# Altium PCB Gate_Driver_Boost_Conv_V1.0_PCB.PcbDoc
Units mm, origin at the board's own origin, x right, y up, seen from the top; angles counter-clockwise.
Board outline 38.61 x 29.34 mm, 2 copper layers (Top Layer, Bottom Layer); 36 components, 28 nets, 106 pads, 91 vias.
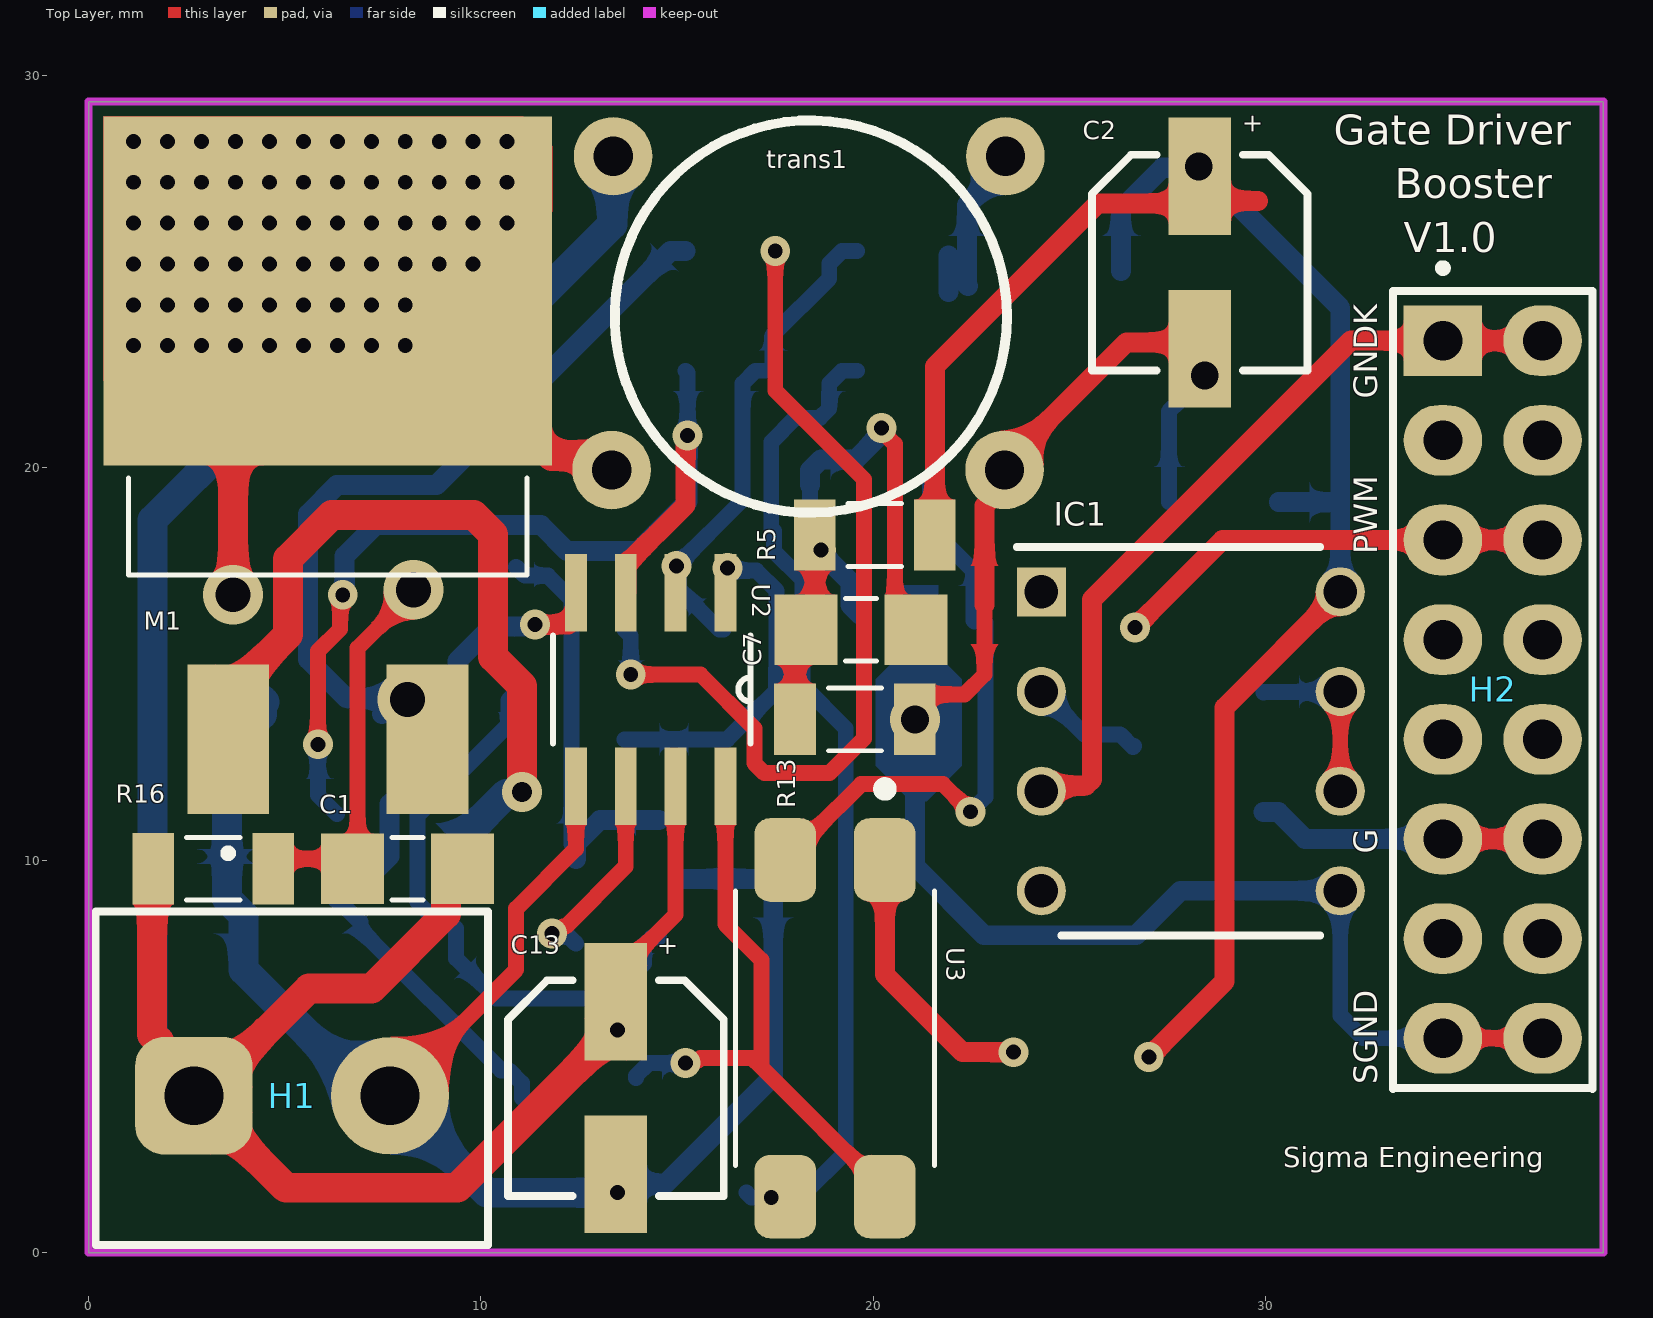
[diagram p0: Top Layer view]
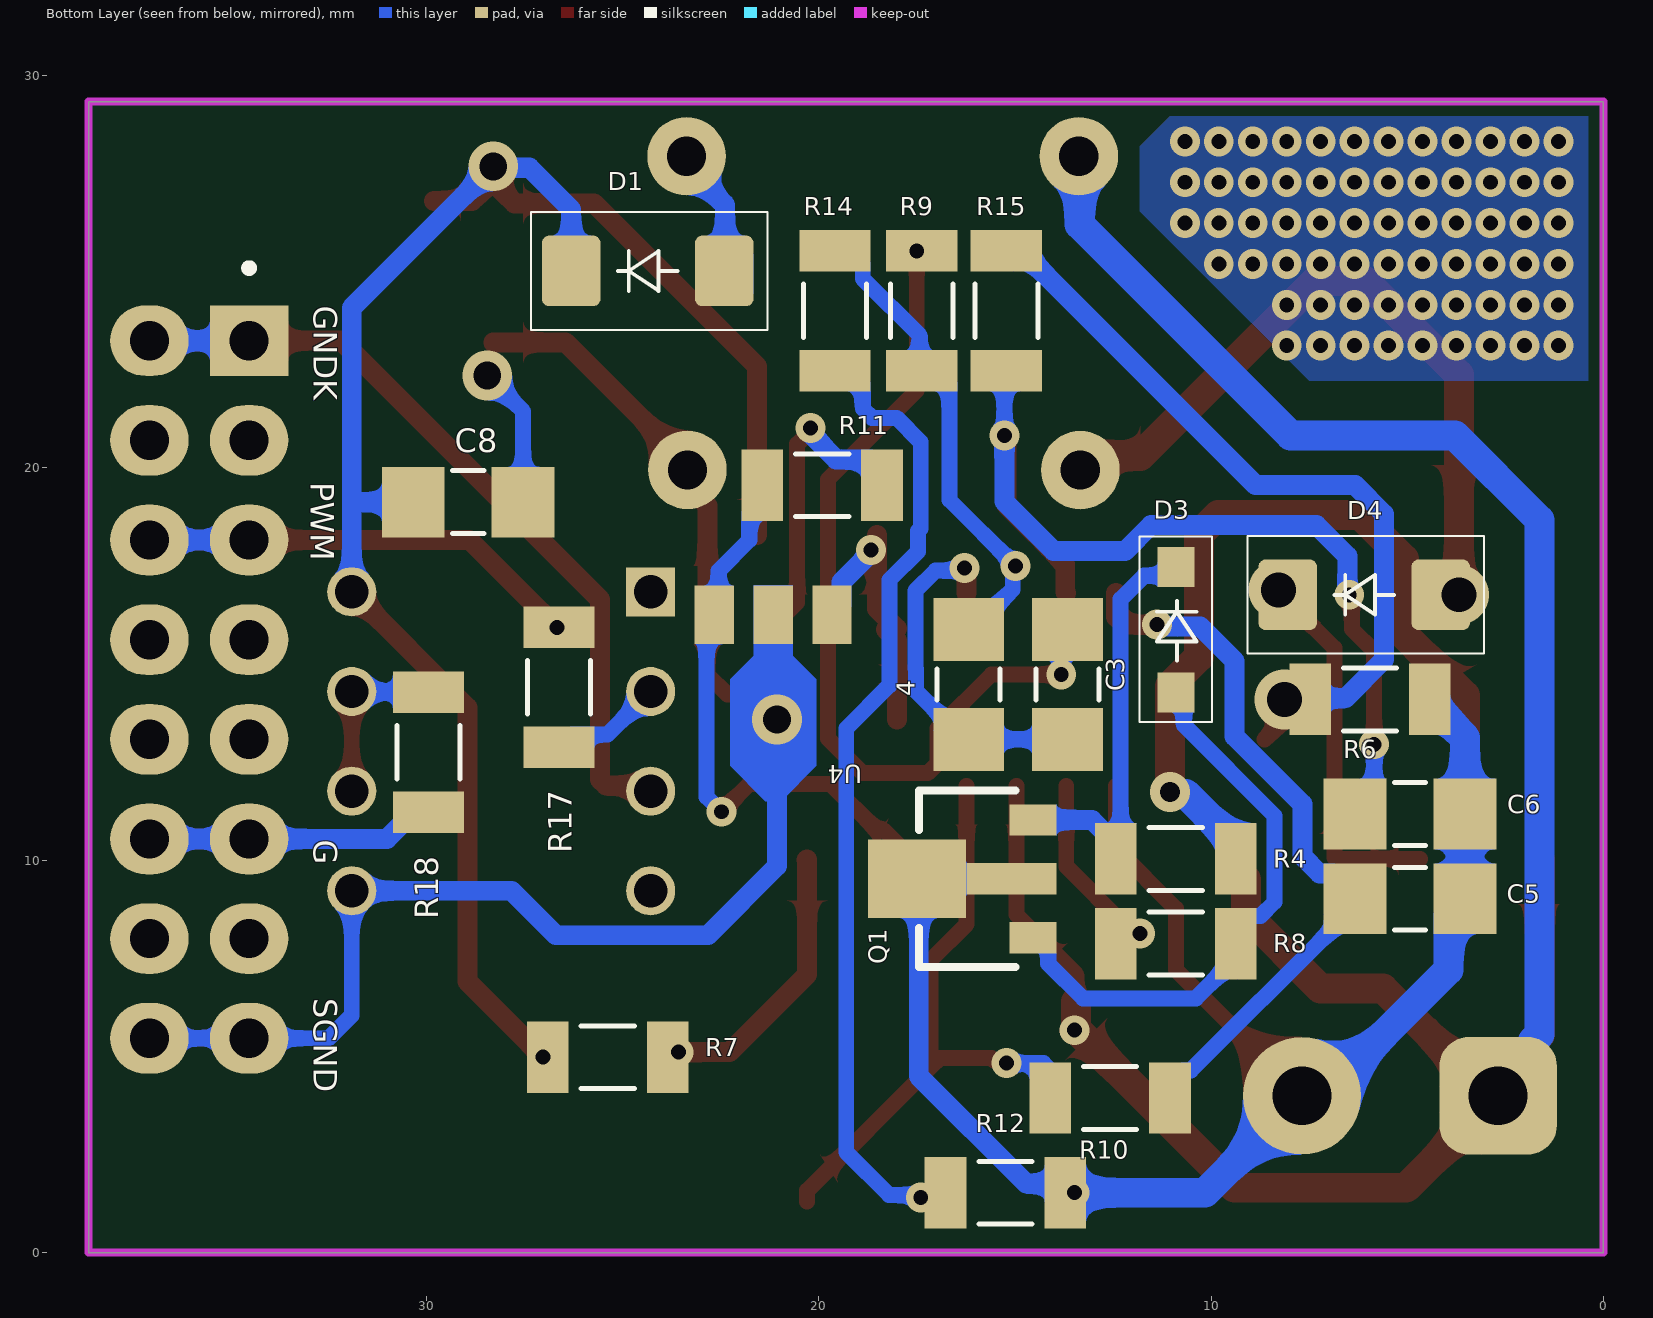
[diagram p1: Bottom Layer view, seen from below]
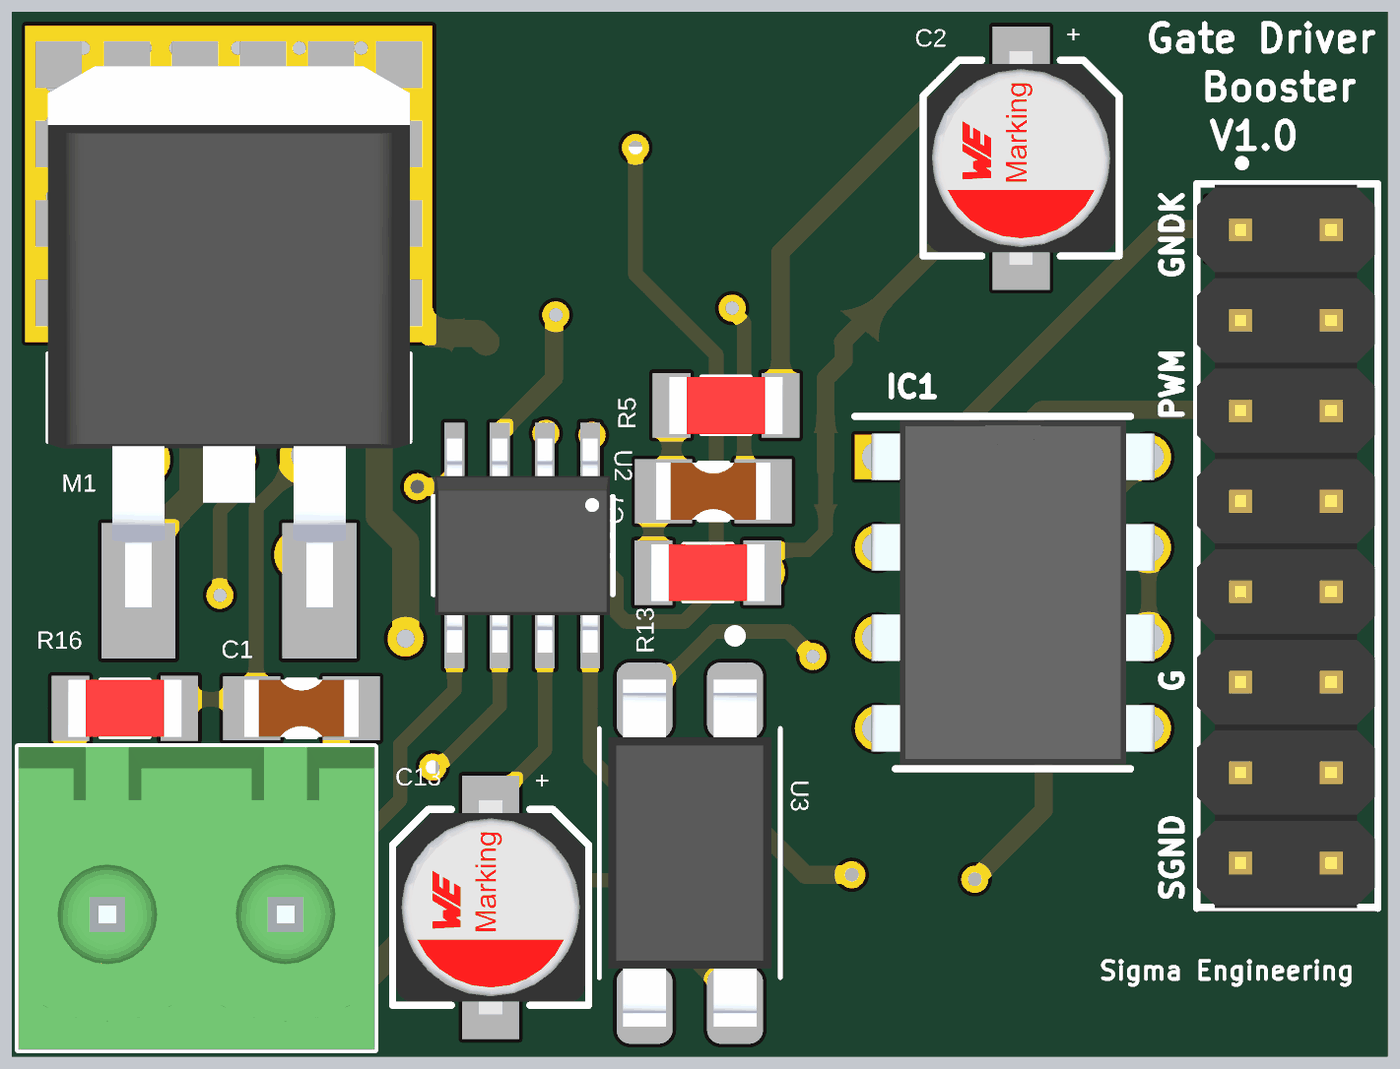
[diagram p2: 3D render of the assembled board from above, using the file's embedded part models]
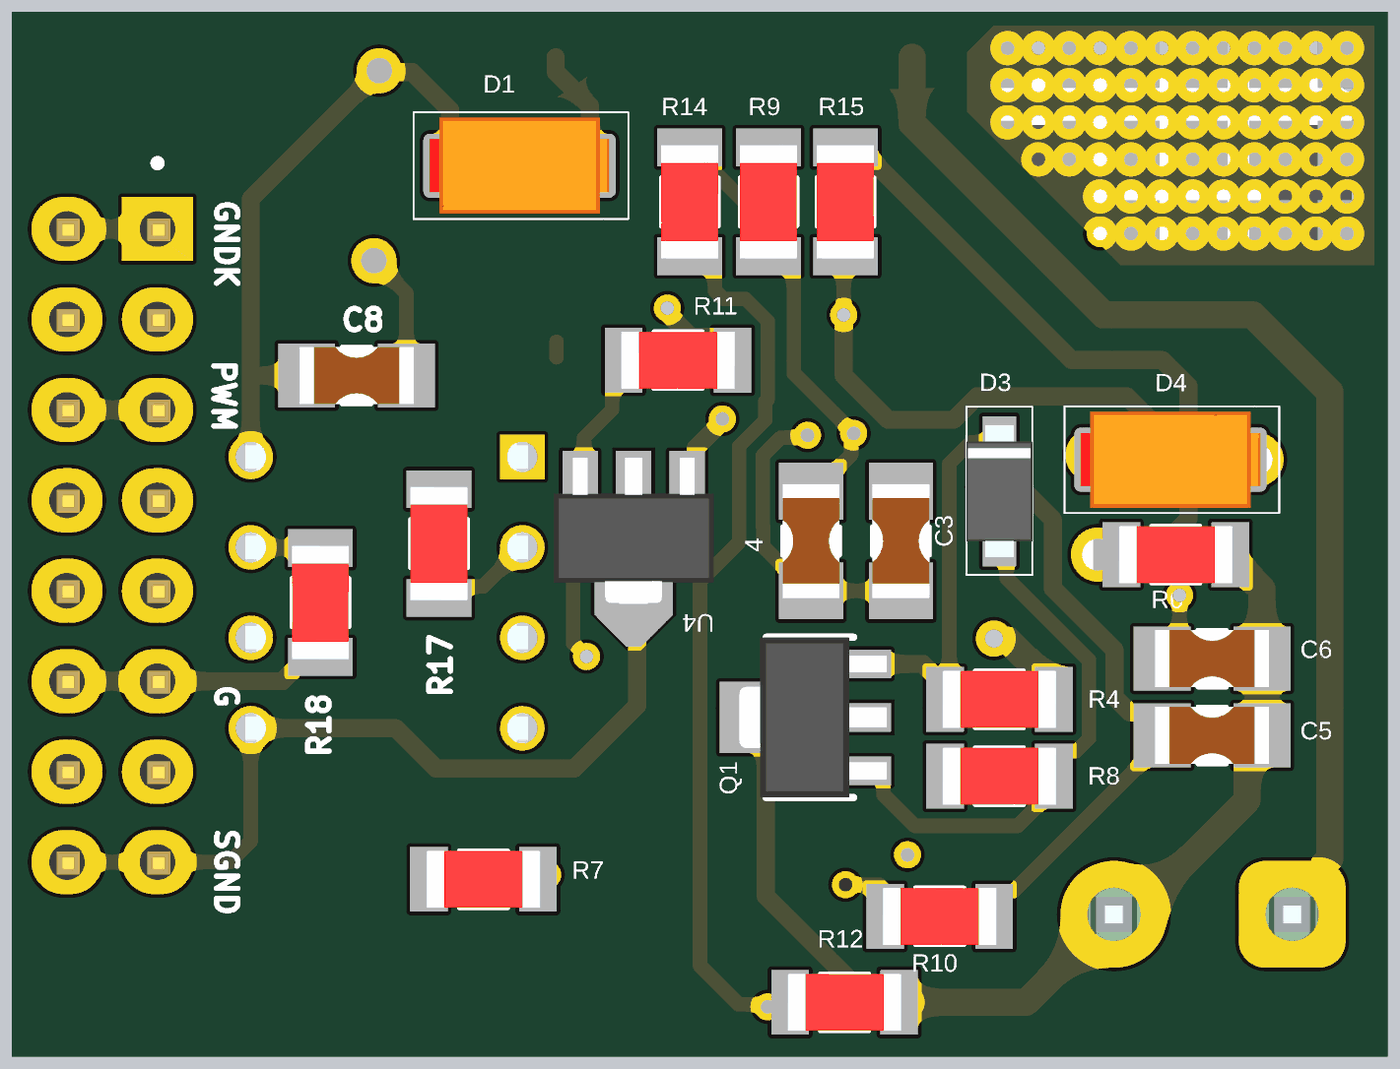
[diagram p3: 3D render of the assembled board from below, using the file's embedded part models]

## Layer stack, top to bottom
Top Solder: solder mask 0.0102, Solder Resist, Dk 3.5
Top Layer: signal copper 0.0356
Dielectric 1: dielectric 0.32, FR-4, Dk 4.8
Bottom Layer: signal copper 0.0356
Bottom Solder: solder mask 0.0102, Solder Resist, Dk 3.5

## Board outline
0,0 38.608,0 38.608,29.337 0,29.337

## Design rules (kind name [scope] priority, off if disabled: settings)
Clearance [All] p1: gap=0.254 ignorepadtopadclearanceinfootprint=FALSE except(0: Arc-Hole Track-Hole SMDPad-Hole THPad-Hole Via-Hole Fill-Hole Poly-Hole Region-Hole Text-Hole)
MinimumSolderMaskSliver [All] p1: minsoldermaskwidth=0.127
PolygonConnect [All] p1: connectstyle=Relief reliefconductorwidth=0.254 reliefentries=4 polygonreliefangle="90 Angle" airgapwidth=0.254
RoutingVias [All] p1: holewidth=0.381 width=0.762 viastyle="Through Hole" minholewidth=0.381 minwidth=0.762 maxholewidth=1.016 maxwidth=2
SilkToSilkClearance [All] p1: silktosilkclearance=0
SilkToSolderMaskClearance [IsPad] p1: minsilkscreentomaskgap=0 clearancetoexposedcopper=TRUE
SolderMaskExpansion [All] p1: expansion=0.102 istentingtop=FALSE
Width [All] p1: maxlimit=0.762 minlimit=0.406 preferedwidth=0.508
27 further rules are at their usual default settings.

## Components (designator, comment, footprint, x,y, rotation, side; value= is the part's Value field where it differs from the comment)
4 "10nAC" CAP_1206 16.18,14.478 r270 bottom
C1 "3.3n" CAP_1206 8.128,9.779 r0 top
C2 "470u-50v" WCAP-ASLI_D5H5.5 28.321,25.232 r90 top
C3 "10nAC" CAP_1206 13.659,14.478 r270 bottom
C5 "13.6n" CAP_1206 4.928,9.017 r0 bottom
C6 "100pf" CAP_1206 4.928,11.176 r0 bottom
C7 "10n" CAP_1206 19.685,15.875 r180 top
C8 "0.1u" CAP_1206 28.934,19.126 r180 bottom
C13 "470u-50v" WCAP-ASLI_D5H5.5 13.437,4.191 r90 top
D1 "Diode" US1K_SMD 24.359,25.019 r180 bottom value="Diode US1K"
D3 "1N5817" 1N5817W 10.897,15.875 r270 bottom
D4 "Diode" US1K_SMD 6.096,16.764 r180 bottom value="Diode US1K"
H1 "PS-IN" PLUG 5.182,4.445 r0 top
H2 "H2*8" HDR2X8 34.519,23.241 r270 top
IC1 "HCPL-3120-060E" DIP762W65P254L965H470Q8N 28.092,13.03 r0 top
M1 "IRF540N" IRF540N_SMD 6.096,20.066 r90 top
Q1 "B772-PNP" B772_SMD 16.138,9.525 r90 bottom
R4 "20" RES_1206 10.897,10.033 r0 bottom
R5 "13.5K" RES_1206 20.041,18.288 r0 top
R6 "0.25/4W" RES_1206 5.948,14.097 r0 bottom
R7 "1K" RES_1206 25.375,4.978 r0 bottom
R8 "47" RES_1206 10.897,7.874 r0 bottom
R9 "11.2K" RES_1206 17.374,24.003 r90 bottom
R10 "600-POTENTIO" RES_1206 12.573,3.937 r0 bottom
R11 "16K" RES_1206 19.914,19.558 r180 bottom
R12 "1K" RES_1206 15.24,1.524 r0 bottom
R13 "2.5K" RES_1206 19.533,13.589 r180 top
R14 "5.6K" RES_1206 19.583,24.003 r270 bottom
R15 "42K" RES_1206 15.215,24.003 r90 bottom
R16 "510" RES_1206 3.175,9.779 r180 top
R17 "200" RES_1206 26.619,14.406 r90 bottom
R18 "200" RES_1206 29.947,12.751 r90 bottom
trans1 "core-name" TRANSFORMER_2 10.119,-66.307 r0 top
U2 "UC3843BN" UC3843_SMD 14.326,14.351 r270 top
U3 "PC817" PC816_SMD 19.025,5.715 r270 top
U4 "TL431" VREG_TL431IPK 21.16,14.256 r0 bottom

## Footprints (in the part's own frame and the unit in brackets; to place one, negate y for a bottom-side part, rotate by r counter-clockwise, add the part's x,y. Pads: shape width x height; smd on the part's side, far side on the other; paste and mask are expansions set on the pad)
1N5817W [mm]
  rect 1.02x0.94 smd: A(1.6,0) C(-1.6,0)
  silkscreen extent -2.37,-0.92 2.35,0.92, body extent -1.85,-0.92 1.85,0.92, height 1.35
B772_SMD [mm]
  rect 0.8x1.2 smd: B(-1.5,-1.6) E(1.5,-1.6)
  rect 0.8x2.3 smd paste-2 mask+0: C(0,-1.05)
  rect 2x2.5 smd: C(0,1.36)
  silkscreen extent -2.25,-1.15 2.25,1.3, body extent -2.25,-2.07 2.25,2.05, height 1.6
CAP_1206 [mm]
  rect 1.6x1.8 smd: 1(-1.4,0) 2(1.4,0)
  silkscreen extent -0.4,-0.8 0.4,0.8, body extent -1.6,-0.8 1.6,0.8, height 1.5
DIP762W65P254L965H470Q8N [mm]
  rect 1.25x1.25 hole 0.85: 1(-3.81,3.81)
  round 1.25 hole 0.85: 2(-3.81,1.27) 3(-3.81,-1.27) 4(-3.81,-3.81) 5(3.81,-3.81) 6(3.81,-1.27) 7(3.81,1.27) 8(3.81,3.81)
  silkscreen extent -4.44,-4.95 3.3,4.95, body extent -3.97,-4.82 3.97,4.82, height 4.7
HDR2X8 [mm] "Connector; Header; 4x2 Position"
  oval 1.8x2 hole 1: 1(0,2.54) 2(2.54,2.54) 2(2.54,0) 3(5.08,2.54) 3(5.08,0) 4(7.62,0) 4(7.62,2.54) 5(10.16,0) 5(10.16,2.54) 6(12.7,0) 6(12.7,2.54) 7(15.24,0) 7(15.24,2.54) 8(17.78,0) 8(17.78,2.54)
  rect 1.8x2 hole 1: 1(0,0)
  silkscreen extent -1.95,-1.27 19.08,3.81, body extent -1.24,-1.27 19.08,3.73, height 8.6
IRF540N_SMD [mm]
  rect 8.89x11.43 smd paste-7: D(4.445,0)
  rect 3.81x2.08 smd: G(-6.985,2.54) S(-6.985,-2.54)
  silkscreen extent -9.99,-5.08 -0.32,5.08, body extent -7.49,-5.08 7.75,5.08, height 4.83
PC816_SMD [mm]
  rrect50% 2.13x1.57 smd: 1(-4.29,1.27) 2(-4.29,-1.27) 3(4.29,-1.27) 4(4.29,1.27)
  silkscreen extent -6.25,-2.54 3.5,2.54, body extent -4.87,-2.29 4.87,2.29, height 4
PLUG [mm] "5.00mm - Open Vertical PCB Header - 02p"
  rrect50% 3x3 hole 1.5: 1(-2.5,-0.45)
  round 3 hole 1.5: 2(2.5,-0.45)
  silkscreen extent -5,-4.25 5,4.25, body extent -5,-4.25 5,4.25, height 12.1
RES_1206 [mm]
  rect 1.06x1.82 smd: 1(-1.528,0) 2(1.528,0)
  silkscreen extent -0.68,-0.8 0.68,0.8, body extent -1.6,-0.8 1.6,0.8, height 0.7
TRANSFORMER_2 [mm]
  round 2 hole 1: 1(3.212,86.25) 2(3.25,94.25) 3(13.226,86.255) 4(13.249,94.247)
  silkscreen extent 3.29,85.16 13.29,95.16, body extent 3.23,85.26 13.23,95.26, height 7
UC3843_SMD [mil]
  rect 78x22 smd: 1(-97,75) 2(-97,25) 3(-97,-25) 4(-97,-75) 5(97,-75) 6(97,-25) 7(97,25) 8(97,75)
  silkscreen extent -54,-98 54,100, body extent -118,-96 118,96, height 69
US1K_SMD [mm]
  rrect25% 1.5x1.8 smd: A(1.95,0) K(-1.95,0)
  silkscreen extent -2.97,-1.5 3.05,1.5, body extent -2.53,-1.35 2.52,1.35, height 2.17
VREG_TL431IPK [mm]
  rect 1x1.5 smd paste-2 mask+0: A(0,-2)
  rect 1x1.5 smd: C(1.5,-2) R(-1.5,-2)
  Top Layer region: 1.1,1.85 1.1,-0.35 0.5,-0.95 0.5,-2.75 -0.5,-2.75 -0.5,-0.95 -1.1,-0.35 -1.1,1.85 -0.2,2.75 0.2,2.75
  body extent -2.25,-2.56 2.25,1.54, height 1.6
WCAP-ASLI_D5H5.5 [mm] "Aluminium Electrolytic V-Chip SMT Capacitors, 5x5.5mm"
  rect 3x1.6 smd: 1(2.2,0) 2(-2.2,0)
  silkscreen extent -2.75,-2.75 2.75,2.75, body extent -3,-2.65 3,2.65, height 5.5

## Part data
4 C1 C3 C5 C6 C7: library part CAP-AC
C2 C8 C13: library part CAP-DC
D3: "Lite-On 1N5817, Schottky Diode, 20V 3A, 2-Pin DO-201AD", Average Rectified Current=3A, Case/Package=DO-201AD, Forward Voltage=850mV, Manufacturer=Vishay, Manufacturer Part Number=1N5820, Max Forward Surge Current (Ifsm)=80A, Max Operating Temperature=125°C, Max Repetitive Reverse Voltage (Vrrm)=20V, Max Reverse Current=150uA, Max Reverse Leakage Current=2mA, Min Operating Temperature=-65°C, Supplier Part Number 1=700-9899, ComponentLink1Description=http://www.liteon-semi.com/download.php?hSFile=1N5820-1N5822-5.pdf&hDFile=tecfile01312524214.pdf&src-supplier=Avnet+Asia, ComponentLink1URL=http://www.liteon-semi.com/download.php?hSFile=1N5820-1N5822-5.pdf&hDFile=tecfile01312524214.pdf&src-supplier=Avnet+Asia, ComponentLink2Description=http://docs-usa.electrocomponents.com/techlib:/itc_doclist_US.htm?stockno=7009899&src-supplier=Allied+Electronics, ComponentLink2URL=http://docs-usa.electrocomponents.com/techlib:/itc_doclist_US.htm?stockno=7009899&src-supplier=Allied+Electronics, Element Configuration=Single, Forward Current=3A, Height=5.3mm, Length=9.5mm, Max Surge Current=80A, Mount="Through Hole", Number of Pins=2, Packaging=Bulk, Peak Non-Repetitive Surge Current=80A, Radiation Hardening=No, RoHS Compliant=No, Stock 1=0, Supplier 1=RSComponents, Width=5.3mm
H1: library part PS-plug
H2: library part "Header 8X2"
IC1: "Integrated Circuit", Manufacturer_Name="Avago Technologies", Mouser Part Number=630-HCPL-3120-060E, Datasheet Link=https://www.broadcom.com/products/optocouplers/industrial-plastic/isolated-gate-drive-optocouplers/gate-drives/hcpl-3120, Height=4.7mm, Manufacturer_Part_Number=HCPL-3120-060E, Mouser Price/Stock=https://www.mouser.co.uk/ProductDetail/Broadcom-Avago/HCPL-3120-060E?qs=s%252BgfxR24RQ6Hbv8y%252BiVbRA%3D%3D
M1: "Mosfet, Power; N-ch; Vdss 100V; Rds(on) 44MILLIOHMS; Id 33A; TO-220AB; Pd 130W; -55DEG", Case/Package=TO-220AB, Continuous Drain Current (ID)=33A, Gate to Source Voltage (Vgs)=20V, Manufacturer="International Rectifier", Max Operating Temperature=175°C, Min Operating Temperature=-55°C, Power Dissipation=130W, Supplier Part Number 1=IRF540NPBF-TUBE, ComponentLink1Description=http://www.produktinfo.conrad.com/datenblaetter/150000-174999/162412-da-01-en-IRF_540_N.pdf?src-supplier=Conrad, ComponentLink1URL=http://www.produktinfo.conrad.com/datenblaetter/150000-174999/162412-da-01-en-IRF_540_N.pdf?src-supplier=Conrad, Manufacturer Part Number=IRF540N, Mount="Through Hole", Number of Elements=1, Number of Pins=3, RoHS Compliant=No, Stock 1=0, Supplier 1="Future Electronics"
R4 R5 R6 R7 R8 R9 R10 R11 R12 R13 R14 R15 R16 R17 R18: library part RES
trans1: library part "flyback trans"
U2: "IC REG CTRLR BST/FLYBK 8-MINIDIP", Case/Package=PDIP, Frequency=250kHz, Manufacturer=STMicroelectronics, Max Frequency=500kHz, Max Operating Temperature=150°C, Max Power Dissipation=800mW, Max Supply Current=17mA, Max Supply Voltage=30V, Min Operating Temperature=-40°C, Min Supply Voltage=12V, Output Current=1A, Output Voltage=5.1V, Package Quantity=50, ComponentLink1Description=http://www.st.com/content/ccc/resource/technical/document/datasheet/b6/e8/cc/ba/4f/cd/42/9b/CD00000966.pdf/files/CD00000966.pdf/jcr:content/translations/en.CD00000966.pdf?src-supplier=Digi-Key, ComponentLink1URL=http://www.st.com/content/ccc/resource/technical/document/datasheet/b6/e8/cc/ba/4f/cd/42/9b/CD00000966.pdf/files/CD00000966.pdf/jcr:content/translations/en.CD00000966.pdf?src-supplier=Digi-Key, ComponentLink2Description=http://www.mouser.com/ds/2/389/uc2842b-974450.pdf?src-supplier=Mouser, ComponentLink2URL=http://www.mouser.com/ds/2/389/uc2842b-974450.pdf?src-supplier=Mouser, ComponentLink3Description=http://www.st.com/web/en/resource/technical/document/datasheet/CD00000966.pdf?src-supplier=Avnet, ComponentLink3URL=http://www.st.com/web/en/resource/technical/document/datasheet/CD00000966.pdf?src-supplier=Avnet, ComponentLink4Description=http://www.st.com/web/en/resource/technical/document/datasheet/CD00000966.pdf?src-supplier=Future+Electronics, ComponentLink4URL=http://www.st.com/web/en/resource/technical/document/datasheet/CD00000966.pdf?src-supplier=Future+Electronics, ComponentLink5Description=https://www.verical.com/server-webapp/html/getDatasheet?partID=66041&src-supplier=Verical, ComponentLink5URL=https://www.verical.com/server-webapp/html/getDatasheet?partID=66041&src-supplier=Verical, ComponentLink6Description=http://www.produktinfo.conrad.com/datenblaetter/1100000-1199999/001185662-da-01-en-IC_REG_CTRLR_PWM_CM_UC3843BN_DIP_8_STM.pdf?src-supplier=Conrad, ComponentLink6URL=http://www.produktinfo.conrad.com/datenblaetter/1100000-1199999/001185662-da-01-en-IC_REG_CTRLR_PWM_CM_UC3843BN_DIP_8_STM.pdf?src-supplier=Conrad, Duty Cycle=100%, Fall Time=50ns, Height=3.32mm, Lead Free="Lead Free", Length=10.92mm, Manufacturer Part Number=UC3843BN, Max Duty Cycle=100%, Mount="Through Hole", Number of Outputs=1, Number of Pins=8, Packaging=Rail/Tube, Power Dissipation=800mW, Pricing 1="1=0.9063, 10=0.7523, 25=0.7389, 100=0.6172, 250=0.5737, 500=0.4903, 1000=0.3493, 4000=0.3129, 5000=0.3123, 6000=0.3104, 8000=0.3085, 10000=0.3066, 20000=0.3047, 25000=0.3027, 30000=0.3008, 50000=0.2988 (USD)", Radiation Hardening=No, REACH SVHC="No SVHC", Rise Time=50ns, RoHS Compliant=Yes, Series=-, Stock 1=669, Supplier 1="Arrow Electronics", Supplier Part Number 1=UC3843BN, Switching Frequency=500kHz, Topology=Boost,Flyback, Weight=0.032805oz, Width=6.6mm
U3: "Optocoupler DC-IN 1-CH Transistor DC-OUT 4-Pin PDIP Sleeve", Case/Package=PDIP, Collector Emitter Saturation Voltage=200mV, Collector Emitter Voltage (VCEO)=35V, Current Transfer Ratio=600%, Forward Current=50mA, Forward Voltage=1.4V, Manufacturer=Sharp, Max Operating Temperature=100°C, Min Operating Temperature=-30°C, Power Dissipation=200mW, Reverse Breakdown Voltage=6V, Fall Time=18000ns, Input Type=DC, Manufacturer Part Number=PC817, Mount="Through Hole", Number of Elements=1, Number of Pins=4, Packaging=Sleeve, Rise Time=18000ns, RoHS Compliant=No, Stock 1=0, Supplier 1="Arrow Electronics", Supplier Part Number 1=PC817
U4: library part TL431CZ, "V-Ref Adjustable 2.495V to 36V 100mA 3-Pin TO-92 Bulk", Case/Package=TO-92, Cathode Current=1mA, Manufacturer=STMicroelectronics, Max Input Voltage=37V, Max Operating Temperature=70°C, Max Output Current=100mA, Max Output Voltage=36V, Min Operating Temperature=0°C, Min Output Voltage=2.495V, Package Quantity=1, Temperature Coefficient=100ppm/°C, Tolerance=2.21%, Accuracy=2%, ComponentLink1Description=http://www.st.com/web/en/resource/technical/document/datasheet/CD00000986.pdf?src-supplier=Digi-Key, ComponentLink1URL=http://www.st.com/web/en/resource/technical/document/datasheet/CD00000986.pdf?src-supplier=Digi-Key, ComponentLink2Description=http://www.st.com/content/ccc/resource/technical/document/datasheet/2d/27/af/41/03/e2/44/8e/CD00000986.pdf/files/CD00000986.pdf/jcr:content/translations/en.CD00000986.pdf?src-supplier=Digi-Key, ComponentLink2URL=http://www.st.com/content/ccc/resource/technical/document/datasheet/2d/27/af/41/03/e2/44/8e/CD00000986.pdf/files/CD00000986.pdf/jcr:content/translations/en.CD00000986.pdf?src-supplier=Digi-Key, ComponentLink3Description=http://www.farnell.com/datasheets/1690313.pdf?src-supplier=Element14, ComponentLink3URL=http://www.farnell.com/datasheets/1690313.pdf?src-supplier=Element14, ComponentLink4Description=http://www.rapidonline.com/pdf/82-0290.pdf?src-supplier=Rapid+Electronics, ComponentLink4URL=http://www.rapidonline.com/pdf/82-0290.pdf?src-supplier=Rapid+Electronics, ComponentLink5Description=https://www.verical.com/server-webapp/html/getDatasheet?partID=98639&src-supplier=Verical, ComponentLink5URL=https://www.verical.com/server-webapp/html/getDatasheet?partID=98639&src-supplier=Verical, ComponentLink6Description=http://www.produktinfo.conrad.com/datenblaetter/150000-174999/155641-da-01-en-SPG_REF_TL431CZ_STM.pdf?src-supplier=Conrad, ComponentLink6URL=http://www.produktinfo.conrad.com/datenblaetter/150000-174999/155641-da-01-en-SPG_REF_TL431CZ_STM.pdf?src-supplier=Conrad, Height=4.4mm, Lead Free="Lead Free", Length=4.7mm, Manufacturer Part Number=TL431CZ, Mount="Through Hole", Nominal Supply Current=1mA, Number of Channels=1, Number of Pins=3, Output Current=100mA, Output Type=Adjustable, Output Voltage=36V, Packaging=Bulk, Pricing 1="1=0.4405, 10=0.3422, 100=0.2291, 500=0.1883, 1000=0.1722, 2500=0.1137, 10000=0.083, 1=0.3921, 10=0.3046, 100=0.2039, 500=0.1676, 1000=0.1299, 2500=0.1012, 10000=0.0723 (USD)", Radiation Hardening=No, REACH SVHC="No SVHC", Reference Type=Shunt,Adjustable, Reference Voltage=36V, RoHS Compliant=Yes, Series=-, Stock 1=5333, Supplier 1="Arrow Electronics", Supplier Part Number 1=TL431CZ, Supply Current=1mA, Weight=0.01lb, Width=3.7mm
D1 D4: Datasheet=https://diotec.com/de/produktliste/D.html, ki_description=Diode, ki_keywords=Diode, Reference=D

## Via types
v1: diameter 0.762, hole 0.381, Top Layer to Bottom Layer, 84 vias
v2: diameter 1.27, hole 0.711, Top Layer to Bottom Layer, 3 vias
v3: diameter 1.524, hole 0.889, Top Layer to Bottom Layer, 3 vias
v4: diameter 1.016, hole 0.508, Top Layer to Bottom Layer, 1 vias

## Nets (pads, with @x,y where several pads share a name; then routed paths per layer and width w, separated by ;. In a path a pad name is that pad's centre, name@x,y a point inside that pad or via, vN(x,y) a via of type N, cw(c..) or ccw(c..) an arc to the next point about the centre after c; other vN are vias at no path point)
G: H2.6 R18.1 | length 9.9
  Top Layer w0.508: H2.6@34.519,10.541 H2.6@37.059,10.541
  Bottom Layer w0.508: R18.1 30.327,11.223 31.008,10.541 34.519,10.541 H2.6@37.059,10.541
GNDK: H2.1 IC1.3 | length 22.8
  Top Layer w0.508: IC1.3 24.424,11.902 25.422,11.902 25.578,12.058 25.578,16.648 32.171,23.241 34.519,23.241 H2.1@37.059,23.241
  Bottom Layer w0.508: H2.1@34.519,23.241 H2.1@37.059,23.241
Isns: M1.S R6.2 R15.2 | length 20.5
  Top Layer w0.406: v3(8.128,14.097) 8.128,13.589 M1.S
  Bottom Layer w0.508: R6.2@7.476,13.73 7.842,14.097 v3(8.128,14.097) ; R6.2 7.446,14.127 6.574,14.127 5.588,15.113 5.588,18.821 6.325,19.558 8.862,19.558 14.835,25.531 R15.2
Net4_1: 4.1 R9.1 R14.1 U2.2 | length 12.6
  Bottom Layer w0.406: 4.1 16.08,15.878 15.054,16.904 15.054,17.433 v1(14.986,17.501) 16.667,19.181 16.667,22.148 16.994,22.475 R9.1 17.429,22.53 17.429,23.377 18.877,24.824 18.877,25.204 19.203,25.531 R14.1
Net4_2: 4.2 C3.2 U2.1 | length 9.1
  Top Layer w0.508: U2.1 16.231,17.399 v1(16.281,17.45)
  Bottom Layer w0.406: C3.2 4.2 16.28,13.078 17.521,14.319 17.521,14.873 17.537,14.889 17.537,16.867 17.023,17.382 16.349,17.382 v1(16.281,17.45)
NetC1_1: C1.1 D4.K R16.1 | length 9.8
  Top Layer w0.406: R16.1@4.674,10.033 6.83,10.033 6.858,10.061 6.858,15.408 8.128,16.678 v3@8.128,16.891
  Bottom Layer w0.762: D4.K 8.173,16.891 v3(8.28,16.891)
NetC3_1: C3.1 R9.2 | length 22.5
  Top Layer w0.406: v1(13.818,14.732) 15.596,14.732 16.967,13.36 16.967,12.471 17.221,12.217 18.88,12.217 19.768,13.105 19.768,19.704 17.501,21.971 v1(17.501,25.527)
  Bottom Layer w0.406: C3.1 13.818,15.72 v1(13.818,14.732)
NetC5_2: C5.2 R10.1 U2.4 | length 18.8
  Top Layer w0.508: v1(11.379,16.002) 12.224,16.002 12.421,16.199 U2.4
  Bottom Layer w0.406: C5.2 6.924,8.42 6.924,8.232 10.512,4.644 10.718,4.644 11.045,4.317 R10.1
  Bottom Layer w0.508: C5.2 6.328,9.117 6.874,9.663 7.233,9.663 7.67,10.1 7.67,11.427 9.398,13.155 9.398,15.078 10.274,15.953 11.331,15.953 v1(11.379,16.002)
NetC6_2: C6.2 R15.1 U2.3 | length 24.9
  Top Layer w0.406: v1(5.842,12.954) 5.842,15.326 6.409,15.893 6.409,16.696 v1(6.477,16.764)
  Top Layer w0.508: U2.3 13.716,16.84 13.716,17.551 14.173,18.009 14.173,18.016 14.471,18.313 14.478,18.313 15.217,19.052 15.217,20.779 v1(15.265,20.828)
  Bottom Layer w0.406: v1(5.842,12.954) 5.842,11.662 C6.2 ; R15.1 15.265,22.424 v1@15.265,20.879
  Bottom Layer w0.508: v1(6.477,16.764) 6.526,16.813 6.526,17.751 7.317,18.542 11.528,18.542 12.188,17.882 14.01,17.882 15.265,19.137 v1(15.265,20.828)
NetC7_1: C7.1 R11.2 | length 8.7
  Top Layer w0.406: v1(20.214,21.019) 20.214,20.938 20.549,20.603 20.549,16.572 21.245,15.875 C7.1@21.276,15.875
  Bottom Layer w0.406: R11.2@18.386,19.178 R11.2
  Bottom Layer w0.508: R11.2 18.386,19.938 18.662,20.214 19.554,20.214 20.214,20.874 v1(20.214,21.019)
NetC7_2: C7.2 R5.1 R13.2 U4.R | length 7.2
  Top Layer w0.508: R13.2 18.005,15.595 18.158,15.748 C7.2 ; C7.2@18.005,15.901 18.513,16.409 R5.1@18.513,18.013 ; R5.1 18.513,18.042 18.648,17.907 v1(18.669,17.907)
  Bottom Layer w0.508: v1(18.669,17.907) 18.669,17.838 19.414,17.094 19.414,16.502 U4.R
NetD1_A: D1.A trans1.4 | length 4.8
  Bottom Layer w0.508: D1.A@21.913,24.478 D1.A@21.913,25.412 ; D1.A@22.409,24.638 22.387,24.66 22.387,26.699 23.347,27.659 trans1.4@23.347,28.063
NetD3_A: D3.A Q1.B R8.1 | length 14.9
  Bottom Layer w0.406: D3.A 10.696,14.074 10.696,13.447 8.381,11.132 8.381,8.934 8.734,8.581 9.042,8.581 9.369,8.254 9.369,7.494 10.386,6.477 13.264,6.477 14.15,7.363 14.15,7.828 14.347,8.025 Q1.B
NetD3_C: D3.C Q1.E R4.2 | length 10.7
  Bottom Layer w0.406: D3.C 11.119,17.253 11.703,17.253 12.302,16.654 R4.2@12.302,10.413
  Bottom Layer w0.508: R4.2 12.425,10.413 13.037,11.025 Q1.E
NetD4_A: D4.A M1.D trans1.1 | length 18.2
  Top Layer w0.762: v3(3.683,16.764) 3.683,22.377 6.071,24.765 7.341,24.765 11.803,20.303 13.073,20.303 trans1.1@13.31,20.066
  other v1: 1.143,23.114 2.009,23.114 2.875,23.114 3.741,23.114 4.607,23.114 5.473,23.114 6.338,23.114 7.204,23.114 8.07,23.114 1.143,24.155 2.009,24.155 2.875,24.155 3.741,24.155 4.607,24.155 5.473,24.155 6.338,24.155 7.204,24.155 8.07,24.155 1.143,25.197 2.009,25.197 2.875,25.197 3.741,25.197 4.607,25.197 5.473,25.197 6.338,25.197 7.204,25.197 8.07,25.197 8.936,25.197 9.802,25.197 1.143,26.238 2.009,26.238 2.875,26.238 3.741,26.238 4.607,26.238 5.473,26.238 6.338,26.238 7.204,26.238 8.07,26.238 8.936,26.238 9.802,26.238 10.668,26.238 1.143,27.28 2.009,27.28 2.875,27.28 3.741,27.28 4.607,27.28 5.473,27.28 6.338,27.28 7.204,27.28 8.07,27.28 8.936,27.28 9.802,27.28 10.668,27.28 1.143,28.321 2.009,28.321 2.875,28.321 3.741,28.321 4.607,28.321 5.473,28.321 6.338,28.321 7.204,28.321 8.07,28.321 8.936,28.321 9.802,28.321 10.668,28.321
NetIC1_2: IC1.2 R17.1 | length 3
  Bottom Layer w0.406: IC1.2@24.31,14.328 IC1.2 25.378,13.205 26.292,13.205 R17.1 R17.1@26.647,12.905
NetIC1_6: IC1.6 IC1.7 R18.2 | length 4.5
  Top Layer w0.406: IC1.6 IC1.7
  Bottom Layer w0.406: R18.2 29.957,14.29 31.892,14.29 IC1.7
NetM1_G: M1.G R4.1 | length 20.4
  Top Layer w0.762: M1.G@3.531,13.335 3.531,14.2 5.08,15.749 5.08,17.678 6.198,18.796 9.815,18.796 10.311,18.3 10.311,15.176 11.049,14.438 v4(11.049,11.738)
  Bottom Layer w0.762: R4.1 9.369,10.413 10.645,11.69 11,11.69 v4(11.049,11.738)
NetR7_1: R7.1 U3.1 | length 7.1
  Top Layer w0.508: U3.1 20.295,7.087 22.276,5.105 v1@23.672,5.105 ; U3.1@20.295,10.021 U3.1@20.31,10.005
  other v1: 23.571,5.105
NetR11_1: R11.1 U3.2 U4.C | length 15.1
  Top Layer w0.406: U3.2 17.755,10.183 18.322,10.75 18.5,10.75 19.688,11.938 21.776,11.938 v1(22.479,11.235)
  Bottom Layer w0.406: R11.1@21.442,19.548 21.442,19.178 21.768,18.851 21.768,18.161 22.552,17.378 22.552,16.114 U4.C@22.585,16.081 ; v1(22.479,11.235) 22.86,11.616 22.86,16.056 U4.C
PGND: C5.1 C6.1 C13.2 H1.2 Q1.C R6.1 R12.1 U2.5 | length 42
  Top Layer w0.406: H1.2 10.897,7.21 10.897,8.763 12.421,10.287 U2.5
  Bottom Layer w0.508: v1(13.475,1.524) 13.703,1.752 14.706,1.752 17.449,4.495 Q1.C@17.449,9.144 ; R12.1 R12.1@13.712,1.904 ; Q1.C@15.088,9.525 Q1.C@17.498,9.525
  Bottom Layer w0.762: R6.1@4.482,14.035 R6.1 4.42,13.717 4.271,13.568 3.974,13.568 3.528,13.122 C6.1 C5.1 3.947,8.598 3.947,7.204 H1.2@7.156,3.995 ; H1.2 10.153,1.524 R12.1@13.563,1.524 ; R12.1@13.36,1.524 R12.1
pwm: R8.2 U2.6 | length 5.4
  Top Layer w0.406: v1(11.811,8.128) 11.907,8.128 12.085,8.306 12.155,8.306 13.691,9.841 U2.6
  Bottom Layer w0.406: v1(11.811,8.128) 12.171,8.128 R8.2
PWM_G: H2.3 R17.2 | length 13.9
  Top Layer w0.508: v1(26.67,15.93) 28.901,18.161 34.519,18.161 H2.3@37.059,18.161
  Bottom Layer w0.508: H2.3@34.519,18.161 H2.3@37.059,18.161
SGND: C2.2 C8.2 H2.8 IC1.5 R13.1 trans1.3 U4.A | length 48.7
  Top Layer w0.406: v2(21.061,13.589) 21.061,13.969 21.316,14.224 22.327,14.224 22.835,14.732 22.835,16.51 ; H2.8@34.519,5.461 H2.8@37.059,5.461
  Top Layer w0.508: 22.835,16.51 22.835,19.035 23.345,19.545 trans1.3 ; trans1.3@23.324,20.071 26.452,23.2 C2.2@28.296,23.2
  Bottom Layer w0.406: U4.A 21.184,16.232 v2@21.184,13.589 ; trans1.3@23.324,19.64 trans1.3@23.324,20.071 ; C8.2 27.534,21.438 v2(28.448,22.352) ; IC1.5 31.902,6.045 32.487,5.461 34.519,5.461 H2.8@37.059,5.461
  Bottom Layer w0.508: 21.775,13.081 21.267,13.589 21.184,13.589 v2(21.061,13.589) 21.061,9.851 22.825,8.087 26.697,8.087 27.83,9.22 IC1.5
Vfb: R12.2 R14.2 U3.3 | length 25.3
  Bottom Layer w0.406: R12.2 16.895,1.397 v1(17.399,1.397) 17.467,1.465 18.204,1.465 19.298,2.559 19.298,13.356 18.197,14.457 18.197,17.141 17.466,17.872 17.466,18.391 17.398,18.459 17.398,20.657 18.015,21.274 18.639,21.274 18.877,21.512 18.877,22.148 19.203,22.475 R14.2
Vin: C1.2 C13.1 H1.1 R16.2 trans1.2 U2.7 | length 68.2
  Top Layer w0.406: C13.1 13.437,7.091 14.961,8.615 U2.7
  Top Layer w0.762: R16.2@1.618,10.033 1.618,5.56 1.79,5.388 1.79,4.886 H1.1 ; C1.2@9.398,9.801 9.109,9.512 9.109,8.626 7.214,6.731 5.617,6.731 2.881,3.995 H1.1 ; C13.1 C13.1@13.437,5.691 ; v1(13.475,5.666) 13.45,5.691 C13.1@13.437,5.691 ; H1.1 5.026,1.651 9.397,1.651 C13.1@13.437,5.691
  Bottom Layer w0.762: H1.1 1.79,4.886 1.79,5.396 1.626,5.56 1.626,18.669 3.785,20.828 7.976,20.828 13.348,26.2 trans1.2@13.348,28.066
Voiso: C2.1 C8.1 D1.K IC1.8 R5.2 R7.2 | length 47.1
  Top Layer w0.508: R5.2 21.569,22.585 25.725,26.741 27.75,26.741 28.296,27.287 28.296,27.6 28.454,27.441 28.454,27.194 28.842,26.806 29.81,26.806 ; v1(27.022,4.978) 28.956,6.913 28.956,13.894 IC1.8
  Bottom Layer w0.508: D1.K 26.309,26.588 27.371,27.651 28.26,27.651 v2(28.296,27.686) 31.902,24.079 31.902,19.177 ; C8.1 31.852,19.126 31.902,19.177 ; IC1.8 31.902,19.177
Vref: R10.2 U2.8 U3.4 | length 16.3
  Top Layer w0.406: v1(15.215,4.826) 15.283,4.894 15.534,4.894 15.593,4.953 16.92,4.953 17.145,4.728 ; U2.8@16.231,11.405 U2.8 16.231,8.371 17.145,7.457 17.145,4.728 ; U3.4@20.295,1.298 20.295,1.578 17.145,4.728
  Bottom Layer w0.406: R10.2@13.949,4.445 13.949,4.499 14.275,4.826 v1(15.215,4.826)
pads on no net: H2.2 H2.4 H2.5 H2.7 IC1.1 IC1.4
copper on no net: | length 0.1
  Top Layer w0.508: 34.519,15.49 34.519,15.621

## Polygon pours and split planes (outlines as drawn)
NetD4_A on Bottom Layer "NETD4_A_L02_P000" (solid, pour order 0): 0.381,28.956 11.049,28.956 11.811,28.194 11.811,26.543 7.493,22.225 0.381,22.225
NetD4_A on Top Layer "NETD4_A_L01_P001" (solid, pour order 1): 0.381,28.956 11.049,28.956 11.811,28.194 11.811,26.543 7.493,22.225 0.381,22.225

## Keep-outs
Keep-Out Layer:
  the board outline again, w0.2

## Silkscreen, mask and mechanical layers (free items; w line width, h text height)
Top Overlay:
  text "Gate Driver" at 31.739,28.236 h0.76
  text "Booster" at 33.293,26.868 h0.76
  text "V1.0" at 33.524,25.5 h0.76
  text "GNDK" at 32.845,21.765 h0.6 r90
  text "PWM" at 32.845,17.803 h0.6 r90
  text "G" at 32.845,10.158 h0.6 r90
  text "SGND" at 32.845,4.29 h0.6 r90
  text "Sigma Engineering" at 30.455,2.176 h0.51
Bottom Overlay:
  text "GNDK" at 32.87,24.132 h0.6 r90
  text "PWM" at 32.946,19.637 h0.6 r90
  text "G" at 32.87,10.518 h0.6 r90
  text "SGND" at 32.87,6.479 h0.6 r90

## Text inside footprints (layer, text, board x,y; h text height)
C2: Top Overlay "+" at 30.023,28.499 h0.8 r90
C13: Top Overlay "+" at 15.113,7.544 h0.8 r90